# Altium PCB QFN-48_L7.0-W7.0-P0.50-TL-EP5.4-1.pcbdoc
Units mil, origin at the board's own origin, x right, y up, seen from the top; angles counter-clockwise.
Board outline 809.24 x 794.49 mil, 2 copper layers (Top Layer, Bottom Layer); 1 components, 0 nets, 49 pads, 0 vias.
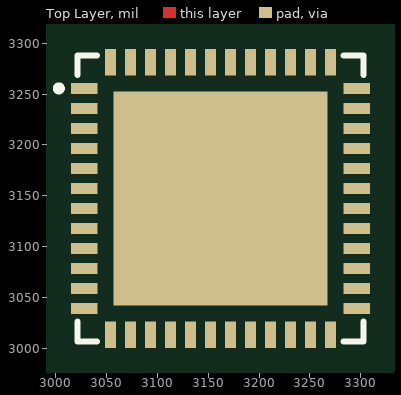
[diagram p0: Top Layer view]
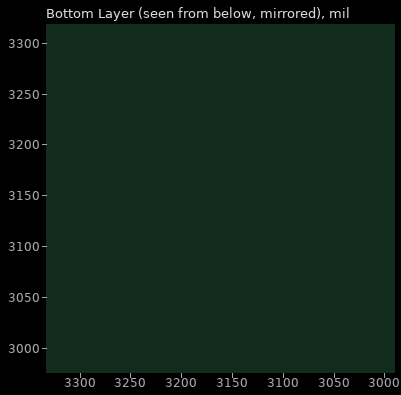
[diagram p1: Bottom Layer view, seen from below]

## Layer stack, top to bottom
Top Layer: signal copper (thickness not stored)
Dielectric: dielectric 12.6, FR-4, Dk 4.8
Bottom Layer: signal copper (thickness not stored)

## Board outline
3559.24,2750 2750,2750 2750,3544.49 3559.24,3544.49

## Components (designator, comment, footprint, x,y, rotation, side; value= is the part's Value field where it differs from the comment)
? "QFN-48_L7.0-W7.0-P0.50-TL-EP5.4-1" QFN-48_L7.0-W7.0-P0.50-TL-EP5.4-1 3162,3147.24 r0 top

## Footprints (in the part's own frame and the unit in brackets; to place one, negate y for a bottom-side part, rotate by r counter-clockwise, add the part's x,y. Pads: shape width x height; smd on the part's side, far side on the other; paste and mask are expansions set on the pad)
QFN-48_L7.0-W7.0-P0.50-TL-EP5.4-1 [mm]
  rect 0.665x0.28 smd: 1(-3.407,2.75) 2(-3.407,2.25) 3(-3.407,1.75) 4(-3.407,1.25) 5(-3.407,0.75) 6(-3.407,0.25) 7(-3.407,-0.25) 8(-3.407,-0.75) 9(-3.407,-1.25) 10(-3.407,-1.75) 11(-3.407,-2.25) 12(-3.407,-2.75) 25(3.407,-2.75) 26(3.407,-2.25) 27(3.407,-1.75) 28(3.407,-1.25) 29(3.407,-0.75) 30(3.407,-0.25) 31(3.407,0.25) 32(3.407,0.75) 33(3.407,1.25) 34(3.407,1.75) 35(3.407,2.25) 36(3.407,2.75)
  rect 0.28x0.665 smd: 13(-2.75,-3.407) 14(-2.25,-3.407) 15(-1.75,-3.407) 16(-1.25,-3.407) 17(-0.75,-3.407) 18(-0.25,-3.407) 19(0.25,-3.407) 20(0.75,-3.407) 21(1.25,-3.407) 22(1.75,-3.407) 23(2.25,-3.407) 24(2.75,-3.407) 37(2.75,3.407) 38(2.25,3.407) 39(1.75,3.407) 40(1.25,3.407) 41(0.75,3.407) 42(0.25,3.407) 43(-0.25,3.407) 44(-0.75,3.407) 45(-1.25,3.407) 46(-1.75,3.407) 47(-2.25,3.407) 48(-2.75,3.407)
  rect 5.35x5.35 smd: 49(0,0)
  silkscreen extent -4.11,-3.58 3.58,3.58

## Nets (pads, with @x,y where several pads share a name; then routed paths per layer and width w, separated by ;. In a path a pad name is that pad's centre, name@x,y a point inside that pad or via, vN(x,y) a via of type N, cw(c..) or ccw(c..) an arc to the next point about the centre after c; other vN are vias at no path point)
pads on no net: ?.1 ?.2 ?.3 ?.4 ?.5 ?.6 ?.7 ?.8 ?.9 ?.10 ?.11 ?.12 ?.13 ?.14 ?.15 ?.16 ?.17 ?.18 ?.19 ?.20 ?.21 ?.22 ?.23 ?.24 ?.25 ?.26 ?.27 ?.28 ?.29 ?.30 ?.31 ?.32 ?.33 ?.34 ?.35 ?.36 ?.37 ?.38 ?.39 ?.40 ?.41 ?.42 ?.43 ?.44 ?.45 ?.46 ?.47 ?.48 ?.49